# Allegro board Hirose7039_A11.brd
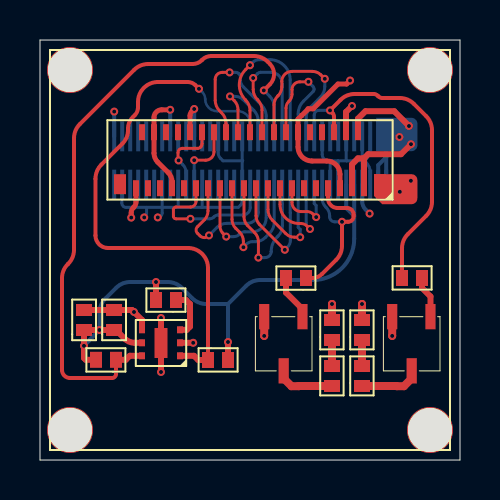
[diagram p0: board, top side]
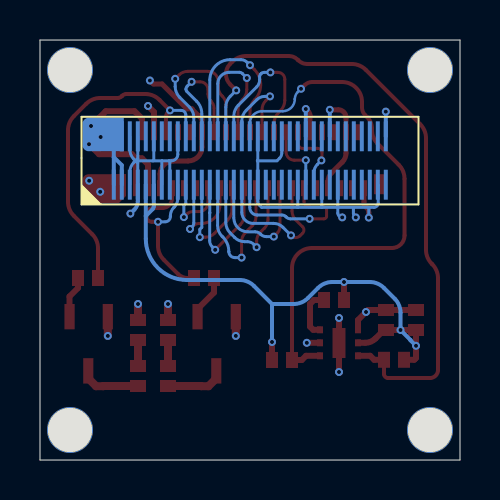
[diagram p1: board, bottom side, seen from below]

Outline 21 x 21 mm; copper layers: TOP, BOTTOM. Coordinates in mm from the lower left corner of the outline.
Outline path: 0,21 0,0 21,0 21,21 0,21

## Design rules (mm)
constraint set DEFAULT: min track width 0.127
net group IR_UART_RX: nets IR_UART_RX N3267747
net group IR_UART_TX: nets IR_UART_TX N3267743

## Placement (name value [footprint] x y rotation side)
C1  0.1uF  [C0402_SMT]  2.2 6.5 90 top
C2  0.1uF  [C0402_SMT]  3.7 6.5 90 top
D2  LED  [LED0402_SMT]  14.6 6 90 top
D4  LED  [LED0402_SMT]  16.1 6 90 top
J3  Hirose FH35C-39S-0.3SHW  [FH35C-39S-0D3SHW]  10.5 13.59 0 top
J8  DF40HC(3.0)-70DS-0.4V(51)  [DF40HC-70DS_]  17.31 16.18 180 bottom
NOREF  -  [unnamed]  19.5 19.5 0 top
NOREF#2  -  [unnamed]  19.5 1.5 0 top
NOREF#3  -  [unnamed]  1.5 1.5 0 top
NOREF#4  -  [unnamed]  1.5 19.5 0 top
Q2  MMBT2222ALT1G  [SOT-23-3]  20 7.6 180 top
Q3  MMBT2222ALT1G  [SOT-23-3]  13.6 7.6 180 top
R66  20K  [R0402_SMT]  14.6 3.7 90 top
R67  1K  [R0402_SMT]  13.3 9.1 180 top
R70  20K  [R0402_SMT]  16.1 3.7 90 top
R71  1K  [R0402_SMT]  18.1 9.1 0 top
R72  10K  [R0402_SMT]  6.8 8 180 top
R73  10K  [R0402_SMT]  3.8 5.01 180 top
R74  10K  [R0402_SMT]  8.4 5 0 top
U1  TMP117  [WDFN-6-EP-2X2]  7.1 6.9 180 top

## Library data of the parts
C1 C2 = CAP NP
D2 D4 = LED
J3 = HiroseFPC_0
J8 = Header2x35
Q2 Q3 = MMBT2222AL
R66 R70 R72-R74 = R
R67 R71 = R: signal model: DEFAULT_RESISTOR_10000OHM_2_1
U1 = TMP117

## Footprints (pads in the part's own frame, mm; a bottom-side part is the same pattern mirrored in y, then rotated)
C0402_SMT
  rect 0.6x0.8 smd: 1(0,0) 2(1,0)
DF40HC-70DS_
  rect 0.2x1.5 smd: 1(0,-2.42) 2(0,0) 3(0.4,-2.42) 4(0.4,0) 5(0.8,-2.42) 6(0.8,0) 7(1.2,-2.42) 8(1.2,0) 9(1.6,-2.42) 10(1.6,0) 11(2,-2.42) 12(2,0) 13(2.4,-2.42) 14(2.4,0) 15(2.8,-2.42) 16(2.8,0) 17(3.2,-2.42) 18(3.2,0) 19(3.6,-2.42) 20(3.6,0) 21(4,-2.42) 22(4,0) 23(4.4,-2.42) 24(4.4,0) 25(4.8,-2.42) 26(4.8,0) 27(5.2,-2.42) 28(5.2,0) 29(5.6,-2.42) 30(5.6,0) 31(6,-2.42) 32(6,0) 33(6.4,-2.42) 34(6.4,0) 35(6.8,-2.42) 36(6.8,0) 37(7.2,-2.42) 38(7.2,0) 39(7.6,-2.42) 40(7.6,0) 41(8,-2.42) 42(8,0) 43(8.4,-2.42) 44(8.4,0) 45(8.8,-2.42) 46(8.8,0) 47(9.2,-2.42) 48(9.2,0) 49(9.6,-2.42) 50(9.6,0) 51(10,-2.42) 52(10,0) 53(10.4,-2.42) 54(10.4,0) 55(10.8,-2.42) 56(10.8,0) 57(11.2,-2.42) 58(11.2,0) 59(11.6,-2.42) 60(11.6,0) 61(12,-2.42) 62(12,0) 63(12.4,-2.42) 64(12.4,0) 65(12.8,-2.42) 66(12.8,0) 67(13.2,-2.42) 68(13.2,0) 69(13.6,-2.42) 70(13.6,0)
FH35C-39S-0D3SHW
  rect 0.3x0.8 smd: 1(5.7,0) 2(5.4,2.8) 3(5.1,0) 4(4.8,2.8) 5(4.5,0) 6(4.2,2.8) 7(3.9,0) 8(3.6,2.8) 9(3.3,0) 10(3,2.8) 11(2.7,0) 12(2.4,2.8) 13(2.1,0) 14(1.8,2.8) 15(1.5,0) 16(1.2,2.8) 17(0.9,0) 18(0.6,2.8) 19(0.3,0) 20(0,2.8) 21(-0.3,0) 22(-0.6,2.8) 23(-0.9,0) 24(-1.2,2.8) 25(-1.5,0) 26(-1.8,2.8) 27(-2.1,0) 28(-2.4,2.8) 29(-2.7,0) 30(-3,2.8) 31(-3.3,0) 32(-3.6,2.8) 33(-3.9,0) 34(-4.2,2.8) 35(-4.5,0) 36(-4.8,2.8) 37(-5.1,0) 38(-5.4,2.8) 39(-5.7,0)
  rect 0.6x1 smd: 40(6.5,0.2) 41(-6.5,0.2)
LED0402_SMT
  rect 0.6x0.8 smd: 1(0,0) 2(1,0)
R0402_SMT
  rect 0.6x0.8 smd: 1(0,0) 2(1,0)
SOT-23-3
  rect 0.51x1.27 smd: 1(0.476,0.434) 2(2.391,0.434) 3(1.415,3.142)
unnamed
  round 2.3 hole 2.2 unplated: (0,0)
WDFN-6-EP-2X2
  rect 0.3x0.35 smd: 1(0.1,1.69) 2(0.1,1.04) 3(0.1,0.39) 4(2,0.39) 5(2,1.04) 6(2,1.69)
  rect 0.65x1.5 smd: 7(1.05,1.05)

## Nets
GND: C1.2 C2.2 J3.4 J3.5 J3.12 J3.30 J3.33 J3.36 J3.39 J3.40 J3.41 J8.5 J8.6 J8.7 J8.8 J8.12 J8.13 J8.15 J8.18 J8.37 J8.38 J8.44 J8.47 J8.50 J8.53 J8.56 J8.57 J8.67 J8.70 Q2.2(EMITTER) Q3.2(EMITTER) U1.2 U1.4 U1.7
ALERT: R72.1 U1.3
IR_1V8: C1.1 C2.1 J8.9 J8.10 J8.11 R72.2 R73.2 R74.2 U1.5(V+)
IR_3V3: J8.14 J8.16
IR_5V0: D2.2 D4.2 J3.1 J3.2 J3.3(VDD50#3) J8.1 J8.2 J8.3 J8.4
IR_D0: J3.13 J8.19
IR_D1: J3.14 J8.24
IR_D2: J3.15 J8.21
IR_D3: J3.16 J8.22
IR_D4: J3.17 J8.23
IR_D5: J3.18 J8.28
IR_D6: J3.19 J8.25
IR_D7: J3.20 J8.26
IR_D8: J3.21 J8.27
IR_D9: J3.22 J8.34
IR_D10: J3.23 J8.29
IR_D11: J3.24 J8.32
IR_D12: J3.25 J8.31
IR_D13: J3.26 J8.49
IR_D14: J8.36 R74.1 U1.1
IR_D15: J8.30 R73.1 U1.6
IR_HSYNC: J3.28 J8.51
IR_PCLK: J3.29 J8.35
IR_UART_RX: J3.6 J8.20 R71.1
IR_UART_TX: J3.7 J8.17 R67.1
IR_VSYNC: J3.27 J8.33
N3267503: D4.1(CATHODE) R70.2
N3267563: D2.1(CATHODE) R66.2
N3267651: Q3.3 R66.1
N3267655: Q2.3 R70.1
N3267743: Q3.1 R67.2
N3267747: Q2.1 R71.2

Pads without a net: J3 8 9 10 11 31 32 34 35 37 38; J8 39 40 41 42 43 45 46 48 52 54 55 58 59 60 61 62 63 64 65 66 68 69

## Via types
v1: diameter 0.4, hole 0.2, TOP to BOTTOM, 47 vias

## Routing (per net, layer and track width the routed paths; a pad name or vN(x,y) marks a point on that pad's centre or on a via; arc(x,y) is an arc through that point)
GND: length 61.7
  TOP w0.25: J3.33 6.6,13.92 arc(6.55,14.16) 6.41,14.37 5.89,14.89 arc(5.75,15.1) 5.7,15.34 J3.36 5.7,17.12 arc(5.81,17.4) 6.08,17.51 v1(6.51,17.51) ; J3.30 7.5,17.21 arc(7.52,17.33) 7.59,17.43 v1(7.71,17.55) ; v1(15.5,18.97) 15.33,18.8 14.9,18.8 13.66,17.56 13.4,17.56 13.4,17.54 13.08,17.22 13.08,17.22 12.9,17.04 J3.12 12.9,15.65 arc(13.11,15.16) 13.6,14.95 14.34,14.95 arc(14.81,14.76) 15,14.29 J3.5 ; J3.39 4.8,12.9 arc(4.77,12.76) 4.69,12.64 4.67,12.62 arc(4.59,12.5) 4.56,12.36 v1(4.56,12.12)
  TOP w0.3: U1.2 v1(7.66,5.86) ; v1(6.05,7.1) U1.7 v1(6.05,4.4) ; C1.2 C2.2 4.6,7.5 v1(4.7,7.4) 5.1,7 U1.4 ; J3.4 15.3,17.4 v1(15.6,17.7)
  TOP w0.4: Q3.2 v1(11.21,6.2) ; Q2.2 v1(17.61,6.2)
  BOTTOM w0.15: 14.54,14.96 14.43,14.96 arc(14.2,15.05) 14.11,15.28 J8.18 ; 14.54,14.96 14.51,14.93 J8.15 ; 14.54,14.96 14.9,14.96 ; 4.56,12.63 5.33,12.63 ; 4.56,12.63 v1(4.56,12.12) ; 4.56,12.63 4.31,12.63 arc(4.15,12.69) 4.09,12.85 4.09,13.75 4.11,13.77 ; 5.33,12.63 5.33,12.32 arc(5.32,12.25) 5.28,12.2 v1(5.21,12.13) ; 5.33,12.63 6.11,12.63 ; 6.11,12.63 6.11,13.77 ; 6.11,12.63 6.11,12.35 arc(6.05,12.19) v1(5.89,12.13) ; 6.11,12.63 6.91,12.63 ; 8.11,13.77 8.11,12.64 8.1,12.63 ; 10.13,14.96 9.15,14.96 9.02,15.09 arc(8.94,15.21) 8.91,15.35 8.91,16.18 ; 10.13,14.96 10.11,14.98 10.11,16.18 ; 10.13,14.96 10.11,14.94 10.11,12.95 arc(10.09,12.83) 10.02,12.74 9.92,12.63 8.1,12.63 ; 8.1,12.63 6.91,12.63 ; J8.5 16.51,14.39 arc(16.46,14.65) 16.31,14.88 16.23,14.96 ; 16.23,14.96 16.11,15.08 J8.8 ; 16.23,14.96 15.34,14.96 ; 16.23,14.96 16.31,15.04 arc(16.46,15.27) 16.51,15.53 J8.6 ; 16.23,14.96 16.11,14.84 J8.7 ; J8.13 14.91,14.95 14.9,14.96 ; 15.34,14.96 15.31,14.99 J8.12 ; 15.34,14.96 14.9,14.96 ; 6.91,12.63 6.91,13.77
  BOTTOM w0.2: J8.7 16.11,12.93 arc(16.15,12.71) 16.28,12.52 v1(16.48,12.32) ; 7.71,16.18 v1(7.71,17.55) ; 3.71,16.18 v1(3.71,17.42) ; 6.51,16.18 v1(6.51,17.51)
  vias: v1(17.99,13.41) v1(18.54,13.96)
ALERT: length 2.5
  TOP w0.3: R72.1 7.3,8 7.5,7.8 7.5,6.67 7.34,6.51 U1.3
IR_1V8: length 30.8
  TOP w0.3: R74.2 v1(9.4,5.9) ; R73.2 2.29,5.01 2.2,5.1 v1(2.2,5.71) C1.1 v1(2.97,6.5) C2.1 3.8,6.5 4.23,6.07 arc(4.46,5.92) 4.74,5.86 U1.5 ; R72.2 v1(5.8,8.9)
  BOTTOM w0.2: 15.71,12.2 J8.9 ; 15.71,12.2 15.37,12.54 arc(15.33,12.61) 15.31,12.68 J8.11 ; 15.71,12.2 15.71,11.06 arc(15.11,9.6) 13.65,9 11.01,9 arc(10.63,8.92) 10.31,8.71 9.4,7.8 ; 9.4,7.8 8.31,7.8 arc(7.93,7.88) 7.61,8.09 7.09,8.61 arc(6.77,8.82) 6.39,8.9 v1(5.8,8.9) 4.51,8.9 arc(4.13,8.82) 3.81,8.61 3.27,8.07 arc(3.05,7.74) 2.97,7.36 v1(2.97,6.5) 2.48,6 2.48,5.99 v1(2.2,5.71) ; 9.4,7.8 v1(9.4,5.9)
IR_5V0: length 15.3
  TOP w0.3: J3.2 15.9,17.07 16.27,17.44 17.71,17.44 v1(18.45,16.7) ; J3.3 15.6,14.78 15.9,15.08 16.2,15.08 ; 16.2,15.08 16.41,15.29 18.05,15.29 v1(18.55,15.79) ; 16.2,15.08 J3.1
  TOP w0.4: D4.2 v1(16.1,7.8) ; D2.2 v1(14.6,7.8)
  BOTTOM w0.2: 17.31,15.13 17.3,15.13 16.91,14.74 J8.3 ; 17.31,15.13 J8.2 ; 17.31,15.13 J8.1
  vias: v1(17.97,16.15)
IR_D0: length 3.9
  TOP w0.15: v1(13.81,12.15) 13.66,12.29 arc(13.52,12.39) 13.35,12.42 13.05,12.42 arc(12.73,12.55) 12.6,12.87 J3.13
  BOTTOM w0.15: v1(13.81,12.15) 13.81,12.73 13.71,12.82 J8.19
IR_D1: length 6.4
  TOP w0.15: J3.14 12.3,17.59 arc(12.34,17.77) 12.44,17.93 12.46,17.95 arc(12.56,18.11) 12.6,18.29 12.6,18.52 arc(12.72,18.79) 12.99,18.91 v1(13.42,18.91)
  BOTTOM w0.15: 12.91,16.18 12.91,17.31 arc(12.98,17.65) 13.17,17.94 13.66,18.43 arc(13.69,18.48) 13.7,18.54 arc(13.69,18.62) 13.64,18.69 v1(13.42,18.91)
IR_D2: length 5.2
  TOP w0.15: J3.15 12,12.77 arc(12.28,12.1) 12.95,11.83 13.04,11.83 arc(13.21,11.79) 13.35,11.7 v1(13.5,11.55)
  BOTTOM w0.15: 13.31,13.77 13.31,11.86 arc(13.33,11.75) 13.39,11.66 v1(13.5,11.55)
IR_D3: length 8.4
  TOP w0.15: J3.16 11.7,17.75 arc(11.75,17.99) 11.88,18.19 11.91,18.22 arc(12.04,18.42) 12.09,18.66 12.09,18.93 arc(12.24,19.28) 12.59,19.43 13.62,19.43 arc(13.85,19.38) 14.04,19.26 v1(14.24,19.06)
  BOTTOM w0.15: 13.31,16.18 13.31,17.12 arc(13.37,17.41) 13.53,17.65 14.02,18.14 arc(14.18,18.38) 14.24,18.67 v1(14.24,19.06)
IR_D4: length 6
  TOP w0.15: J3.17 11.4,12.52 arc(11.46,12.23) 11.62,11.99 12.29,11.32 arc(12.49,11.19) 12.73,11.14 v1(13.01,11.14)
  BOTTOM w0.15: v1(13.01,11.14) 13.01,11.53 12.91,11.63 12.91,13.77
IR_D5: length 7.3
  TOP w0.15: v1(10.66,19.1) 10.66,18.53 arc(10.71,18.25) 10.87,18.02 10.89,18 arc(11.05,17.77) 11.1,17.49 J3.18
  BOTTOM w0.15: v1(10.66,19.1) 10.89,19.33 arc(10.95,19.37) 11.02,19.38 11.54,19.38 arc(11.94,19.22) 12.11,18.81 12.11,16.18
IR_D6: length 7
  TOP w0.15: J3.19 10.8,12.21 arc(10.85,11.97) 10.99,11.76 v1(12.24,10.51)
  BOTTOM w0.15: 12.51,13.77 12.51,12.36 12.52,12.36 12.52,10.97 arc(12.48,10.8) 12.39,10.66 v1(12.24,10.51)
IR_D7: length 9.2
  TOP w0.15: J3.20 10.5,17.47 arc(10.44,17.76) 10.28,18 arc(9.97,18.76) 10.28,19.52 v1(10.5,19.74)
  BOTTOM w0.15: 12.51,16.18 12.51,19 arc(12.21,19.72) 11.49,20.02 10.96,20.02 arc(10.79,19.98) 10.65,19.89 v1(10.5,19.74)
IR_D8: length 8
  TOP w0.15: v1(10.92,10.12) 10.92,10.92 arc(10.87,11.16) 10.73,11.37 10.39,11.71 arc(10.25,11.92) 10.2,12.16 J3.21
  BOTTOM w0.15: 12.11,13.77 12.11,12.82 12.12,12.81 12.12,11.72 arc(12.06,11.43) 11.9,11.19 11.86,11.15 arc(11.64,10.82) 11.56,10.43 11.56,10.43 arc(11.47,10.21) 11.26,10.12 v1(10.92,10.12)
IR_D9: length 4.7
  TOP w0.15: J3.22 9.9,17.51 arc(9.85,17.76) 9.71,17.97 v1(9.5,18.18)
  BOTTOM w0.15: 10.91,16.18 10.91,16.95 arc(10.85,17.24) 10.69,17.48 10.16,18.02 arc(9.97,18.14) 9.76,18.18 v1(9.5,18.18)
IR_D10: length 7.2
  TOP w0.15: v1(10.17,10.64) 10.17,10.94 arc(10.12,11.18) 9.98,11.39 9.79,11.58 arc(9.65,11.79) 9.6,12.03 J3.23
  BOTTOM w0.15: 11.71,13.77 11.71,11.88 arc(11.65,11.59) 11.49,11.35 11.26,11.12 arc(11.03,10.97) 10.77,10.92 10.63,10.92 arc(10.46,10.88) 10.32,10.79 v1(10.17,10.64)
IR_D11: length 7.8
  TOP w0.15: J3.24 9.3,16.83 arc(9.24,17.12) 9.08,17.36 8.98,17.46 arc(8.82,17.7) 8.76,17.99 8.76,19.04 arc(8.86,19.28) 9.11,19.38 v1(9.48,19.38)
  BOTTOM w0.15: 11.31,16.18 11.31,17.2 arc(11.25,17.49) 11.09,17.73 10.17,18.65 arc(10.06,18.82) 10.02,19.01 10.02,19.16 arc(10,19.24) 9.96,19.3 9.94,19.32 arc(9.88,19.36) 9.8,19.38 v1(9.48,19.38)
IR_D12: length 6.6
  TOP w0.15: v1(9.31,11.17) 9.15,11.33 arc(9.04,11.5) 9,11.69 J3.25
  BOTTOM w0.15: 11.31,13.77 11.31,12.11 arc(11.11,11.61) 10.61,11.41 10.24,11.41 arc(10.1,11.38) 9.98,11.3 9.96,11.28 arc(9.84,11.2) 9.7,11.17 v1(9.31,11.17)
IR_D13: length 3.4
  TOP w0.15: J3.26 8.7,15.41 arc(8.58,15.11) 8.28,14.99 v1(7.71,14.99)
  BOTTOM w0.15: 7.71,13.77 v1(7.71,14.99)
IR_D14: length 28
  TOP w0.2: v1(7.95,18.56) 7.77,18.74 arc(7.59,18.86) 7.39,18.9 5.9,18.9 arc(5.19,18.61) 4.9,17.9 4.9,17.63 arc(4.86,17.42) 4.74,17.24 4.64,17.14 arc(4.46,16.87) 4.4,16.57 4.4,16.48 arc(4.33,16.13) 4.13,15.83 3.07,14.77 arc(2.85,14.44) 2.77,14.06 2.77,11.23 arc(2.96,10.78) 3.4,10.6 7.4,10.6 arc(8.11,10.31) 8.4,9.6 R74.1
  TOP w0.3: R74.1 7.91,5 7.7,5.21 U1.1
  BOTTOM w0.127: v1(7.95,18.56) 8.11,18.4 arc(8.22,18.23) 8.26,18.04 arc(8.44,17.62) 8.86,17.44 9.9,17.44 arc(10.33,17.26) 10.51,16.83 10.51,16.18
IR_D15: length 32.6
  TOP w0.2: R73.1 3.8,4.3 arc(3.74,4.16) 3.6,4.1 1.5,4.1 arc(1.22,4.22) 1.1,4.5 1.1,9.1 arc(1.17,9.47) 1.39,9.79 1.41,9.81 arc(1.63,10.13) 1.7,10.5 1.7,16.09 arc(1.78,16.47) 1.99,16.79 4.71,19.51 arc(5.03,19.72) 5.41,19.8 7.64,19.8 arc(7.88,19.85) 8.09,19.99 8.11,20.01 arc(8.32,20.15) 8.56,20.2 10.69,20.2 arc(11.07,20.12) 11.39,19.91 11.49,19.81 arc(11.7,19.3) 11.49,18.78 v1(11.19,18.48)
  TOP w0.3: U1.6 4.49,5.21 4.29,5.01 R73.1
  BOTTOM w0.15: 11.71,16.18 11.71,17.65 arc(11.65,17.94) 11.49,18.18 v1(11.19,18.48)
IR_HSYNC: length 3.8
  TOP w0.15: J3.28 8.1,15.8 arc(8.08,15.73) 8.04,15.66 8.02,15.64 arc(7.95,15.6) 7.88,15.58 7.11,15.58 arc(6.96,15.52) 6.9,15.37 6.9,15.01 v1(6.93,14.98)
  BOTTOM w0.15: 7.31,13.77 7.31,14.35 arc(7.26,14.58) 7.13,14.78 v1(6.93,14.98)
IR_PCLK: length 7.7
  TOP w0.15: v1(7.52,12.06) 6.8,12.06 arc(6.71,12.1) 6.67,12.19 6.67,12.52 arc(6.71,12.61) 6.8,12.65 7.52,12.65 arc(7.72,12.73) 7.8,12.93 J3.29
  BOTTOM w0.15: v1(7.52,12.06) 8.48,12.06 arc(8.59,12.08) 8.68,12.14 8.71,12.17 arc(8.8,12.23) 8.91,12.25 10.14,12.25 arc(10.4,12.36) 10.51,12.62 10.51,13.77
IR_UART_RX: length 17.3
  TOP w0.2: J3.6 14.7,17.16 arc(14.68,17.27) 14.61,17.37 v1(14.5,17.48) 15.03,18.01 arc(15.35,18.22) 15.73,18.3 16.68,18.3 arc(16.79,18.28) 16.89,18.21 16.91,18.19 arc(17.01,18.12) 17.12,18.1 17.99,18.1 arc(18.37,18.02) 18.69,17.81 19.31,17.19 arc(19.52,16.87) 19.6,16.49 19.6,12.91 arc(19.52,12.53) 19.31,12.21 18.39,11.29 arc(18.18,10.97) 18.1,10.59 R71.1
  BOTTOM w0.15: v1(14.5,17.48) 13.94,17.48 arc(13.78,17.41) 13.71,17.25 J8.20
IR_UART_TX: length 9.4
  TOP w0.2: J3.7 14.4,13.08 arc(14.54,12.74) 14.88,12.6 15.35,12.6 arc(15.58,12.5) 15.68,12.27 15.68,12.19 arc(15.6,11.99) 15.4,11.91 v1(15.1,11.91) 15.1,10.71 arc(15.02,10.33) 14.81,10.01 14.1,9.3 arc(13.88,9.15) 13.62,9.1 R67.1
  BOTTOM w0.15: v1(15.1,11.91) 14.74,11.91 arc(14.56,11.99) 14.48,12.17 14.48,12.2 arc(14.44,12.43) 14.31,12.63 14.29,12.65 arc(14.16,12.84) 14.11,13.07 J8.17
IR_VSYNC: length 7.5
  TOP w0.15: J3.27 8.4,12.45 arc(8.35,12.21) 8.21,12 7.87,11.66 arc(7.8,11.5) 7.87,11.34 8,11.21 arc(8.21,11.12) 8.43,11.21 v1(8.45,11.23)
  BOTTOM w0.15: 10.91,13.77 10.91,12.39 arc(10.75,11.99) 10.35,11.83 9.32,11.83 arc(9.07,11.78) 8.86,11.64 v1(8.45,11.23)
N3267503: length 1.3
  TOP w0.4: D4.1 R70.2
N3267563: length 1.3
  TOP w0.4: D2.1 R66.2
N3267651: length 3
  TOP w0.4: R66.1 12.94,3.7 12.93,3.69 12.57,3.69 12.19,4.08 Q3.3
N3267655: length 3
  TOP w0.4: R70.1 17.83,3.7 17.84,3.69 18.2,3.69 18.59,4.08 Q2.3
N3267743: length 2.3
  TOP w0.3: Q3.1 13.12,7.55 12.3,8.37 R67.2
N3267747: length 2.1
  TOP w0.3: Q2.1 19.52,8.18 19.1,8.6 R71.2

## Copper pours and planes (outline as drawn; the poured copper is in the pictures)
GND on TOP (solid shape): 18.57,14.29 18.78,14.2 18.87,13.99 18.87,13.09 18.78,12.88 18.57,12.79 17.11,12.79 16.7,13.2 16.7,14.29
IR_5V0 on BOTTOM (solid shape): 18.57,17.11 18.78,17.02 18.87,16.81 18.87,15.74 18.78,15.53 18.57,15.44 16.81,15.44 16.81,17.11
